# EAGLE board 7 (EAGLE 9.6.2)
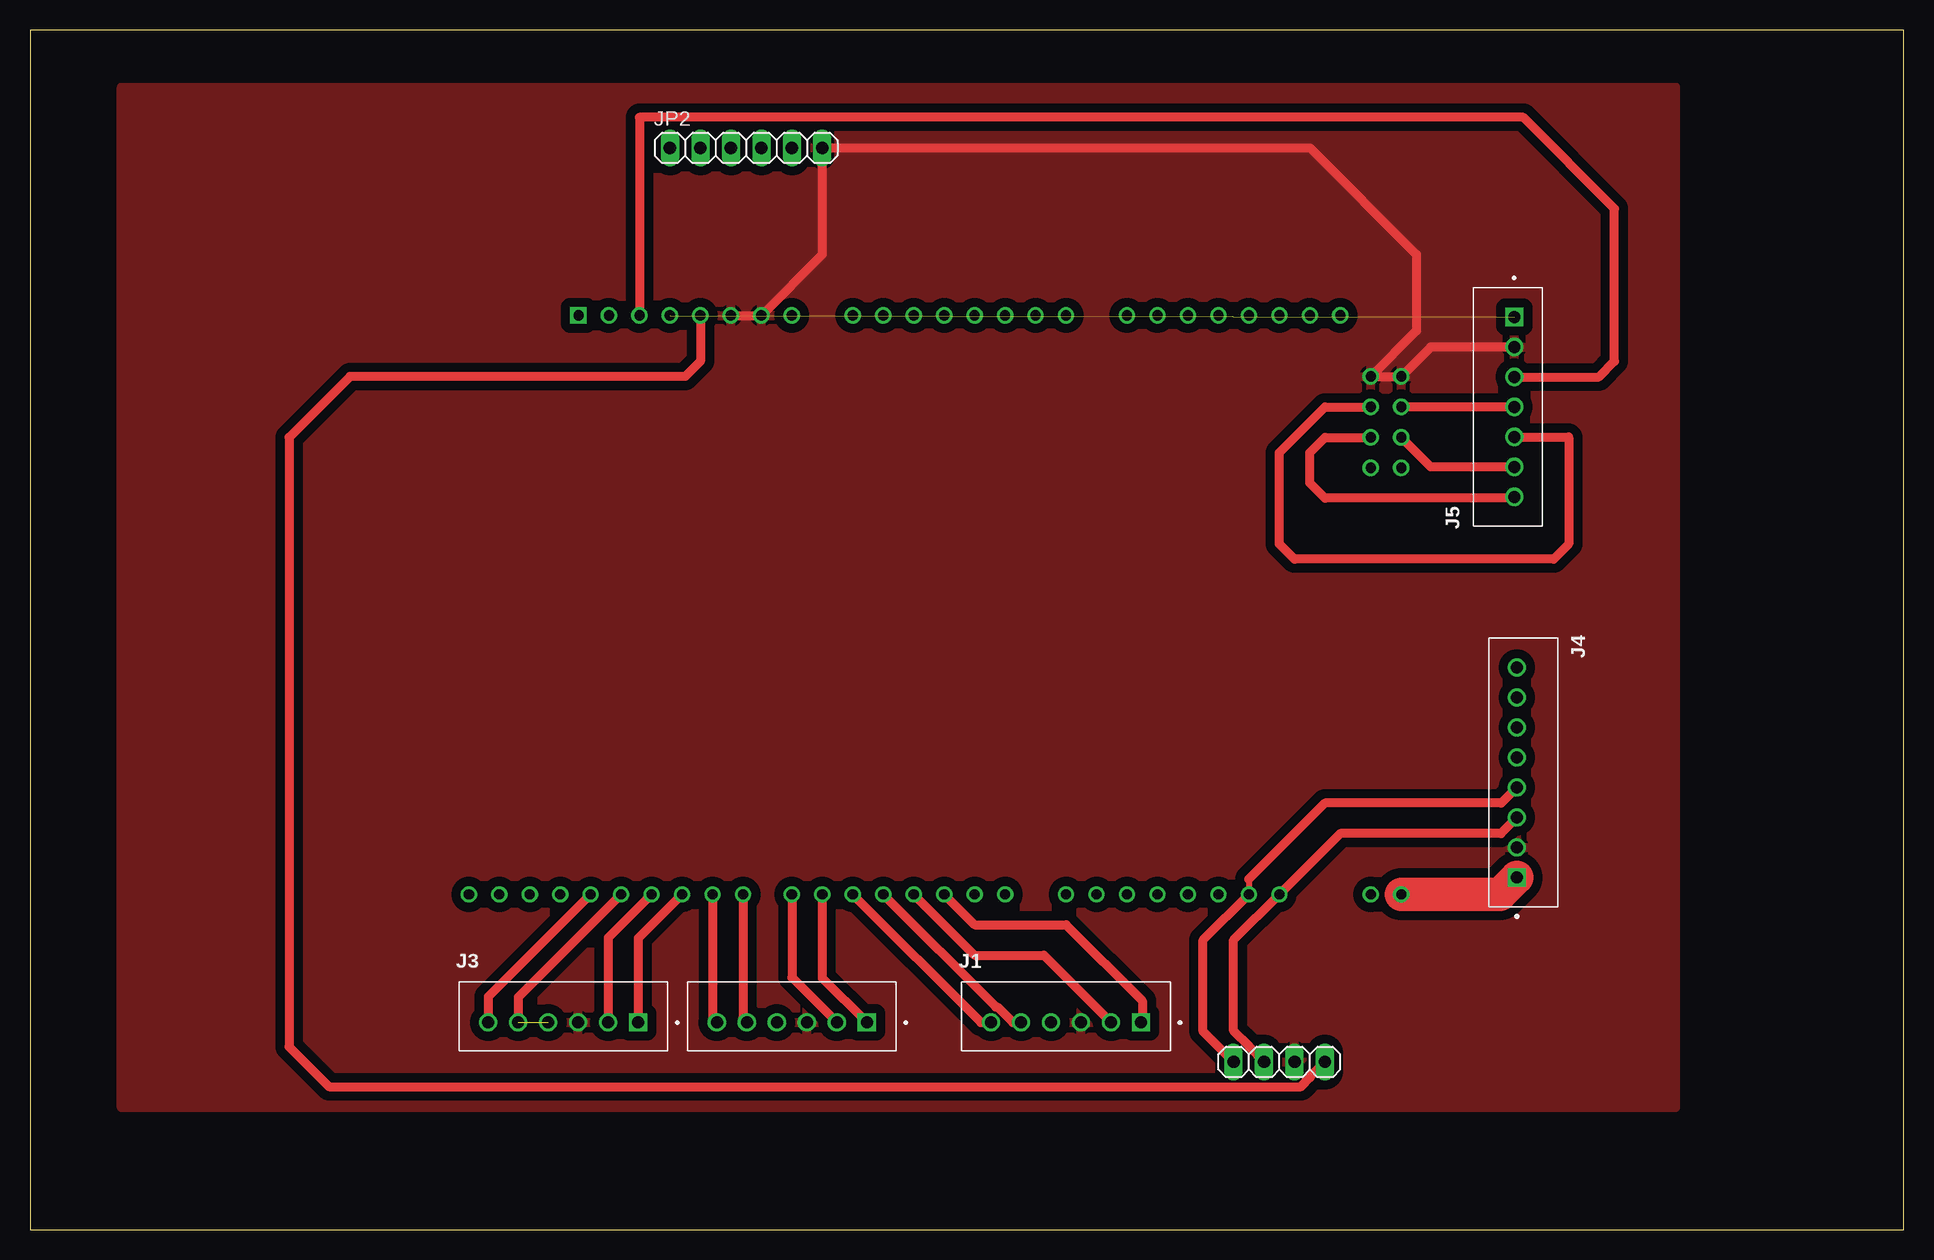
[diagram p0: board, top side]
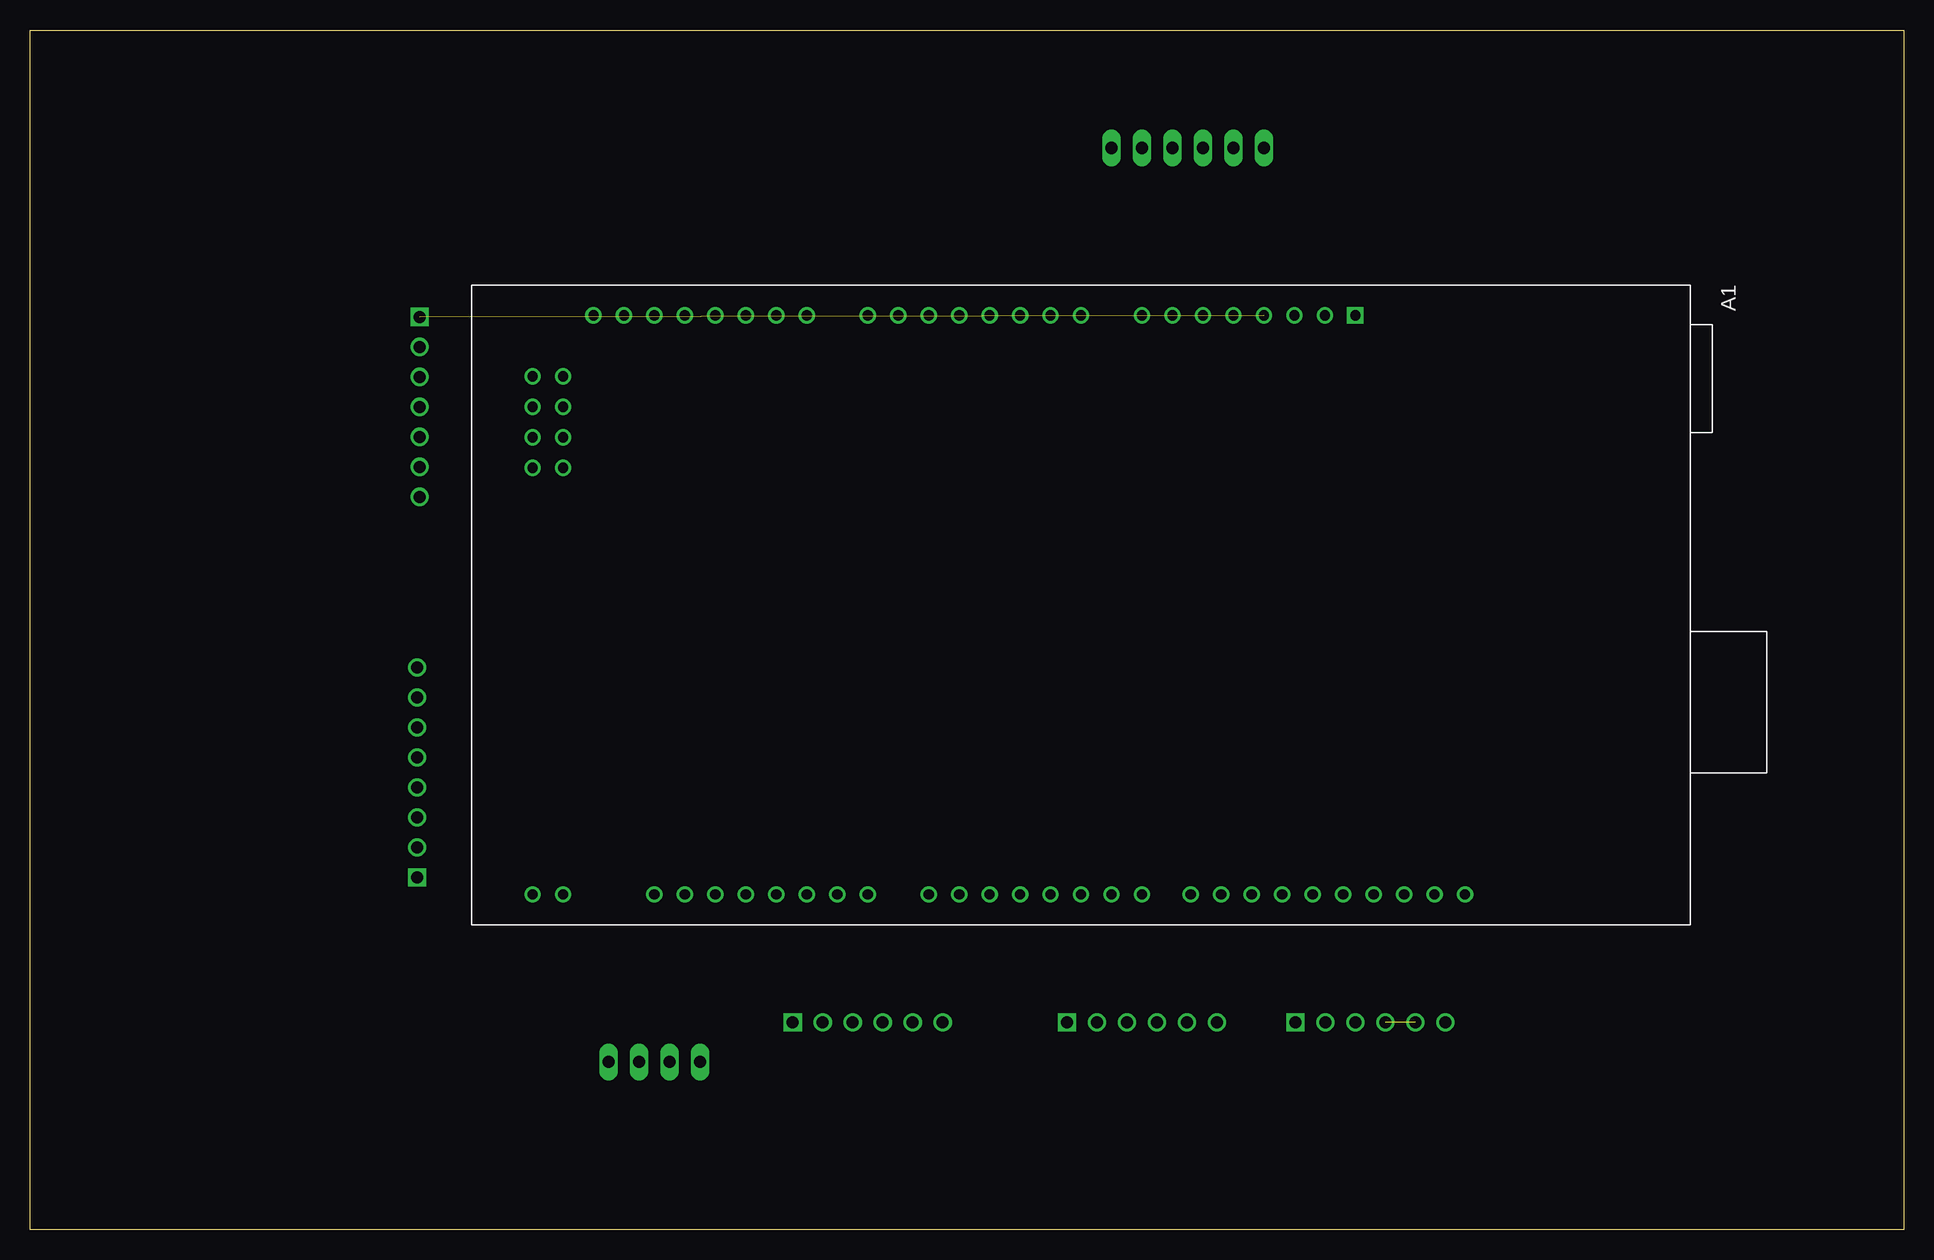
[diagram p1: board, bottom side, seen from below]

Size 156.19 x 100 mm. Coordinates in mm from the lower left corner, seen from the top.
Outline: 0,0 156.19,0 156.19,100 0,100 0,0
Copper layers (1*16): Top 0.035mm / dielectric 1.5mm / Bottom 0.035mm
Design rules "default": minimum track width 6mil, minimum drill 0.35mm, track to track 6mil, track to pad 6mil, pad to pad 6mil, via to via 6mil, smd to smd 6mil, copper to edge 40mil, drill to drill 6mil, minimum pad ring 10mil, minimum via ring 8mil, stop-mask expansion 4mil, vias tented up to drill 0mil, thermal gap 10mil

## Footprints (pad centres in the part's own frame; a part is rotated, then mirrored left to right if it is on the bottom)
ARDUINO_ARDUINO_MEGA_2560_REV3_A000067 = drill 0.85: 0 24.13,-12.7; 1 24.13,-10.16; 2 24.13,-7.62; 3 24.13,-5.08; 3V3 -24.13,15.24; 4 24.13,-2.54; 5 24.13,0; 5V_1 -24.13,12.7; 5V_2 24.13,-43.18; 5V_3 24.13,-45.72; 6 24.13,2.54; 7 24.13,5.08; 8 24.13,9.144; 9 24.13,11.684; 10 24.13,14.224; 11 24.13,16.764; 12 24.13,19.304; 13 24.13,21.844; 14 24.13,-17.78; 15 24.13,-20.32; 16 24.13,-22.86; 17 24.13,-25.4; 18 24.13,-27.94; 19 24.13,-30.48; 20 24.13,-33.02; 21 24.13,-35.56; 48 -11.43,-43.18; 49 -11.43,-45.72; 50 -13.97,-43.18; 51 -13.97,-45.72; 52 -16.51,-43.18; 53 -16.51,-45.72; AD0 -24.13,0; AD1 -24.13,-2.54; AD2 -24.13,-5.08; AD3 -24.13,-7.62; AD4 -24.13,-10.16; AD5 -24.13,-12.7; AD6 -24.13,-15.24; AD7 -24.13,-17.78; AD8 -24.13,-22.86; AD9 -24.13,-25.4; AD10 -24.13,-27.94; AD11 -24.13,-30.48; AD12 -24.13,-33.02; AD13 -24.13,-35.56; AD14 -24.13,-38.1; AD15 -24.13,-40.64; AREF 24.13,26.924; GND1 -24.13,10.16; GND2 -24.13,7.62; GND3 24.13,24.384; GND4 -19.05,-43.18; GND5 -19.05,-45.72; IOREF -24.13,20.32; RESET -24.13,17.78; SCL 24.13,32.004; SDA 24.13,29.464; VIN -24.13,5.08 | drill 0.85 square: NC -24.13,22.86
JST_B6B-XH-A(LF)(SN) = drill 1 square: 1 6.25,-0.525 | drill 1: 2 3.75,-0.525; 3 1.25,-0.525; 4 -1.25,-0.525; 5 -3.75,-0.525; 6 -6.25,-0.525
JST_B8B-XH-A(LF)(SN) = drill 1 square: 1 8.75,-0.525 | drill 1: 2 6.25,-0.525; 3 3.75,-0.525; 4 1.25,-0.525; 5 -1.25,-0.525; 6 -3.75,-0.525; 7 -6.25,-0.525; 8 -8.75,-0.525
JST_B7B-XH-A = drill 1 square: 1 7.5,-0.525 | drill 1: 2 5,-0.525; 3 2.5,-0.525; 4 0,-0.525; 5 -2.5,-0.525; 6 -5,-0.525; 7 -7.5,-0.525
1X04 = drill 1.016 long: 1 -3.81,0; 2 -1.27,0; 3 1.27,0; 4 3.81,0
1X06 = drill 1.016 long: 1 -6.35,0; 2 -3.81,0; 3 -1.27,0; 4 1.27,0; 5 3.81,0; 6 6.35,0

## Placement (x,y rotation side)
A1  ARDUINO_MEGA_2560_REV3_A000067  [ARDUINO_ARDUINO_MEGA_2560_REV3_A000067]  68.58,52.07 270 bottom
J1  B6B-XH-A(LF)(SN)  [JST_B6B-XH-A(LF)(SN)]  86.36,17.78 0 top
J2  B6B-XH-A(LF)(SN)  [JST_B6B-XH-A(LF)(SN)]  63.5,17.78 0 top
J3  B6B-XH-A(LF)(SN)  [JST_B6B-XH-A(LF)(SN)]  44.45,17.78 0 top
J4  B8B-XH-A(LF)(SN)  [JST_B8B-XH-A(LF)(SN)]  124.46,38.1 270 top
J5  B7B-XH-A  [JST_B7B-XH-A]  123.19,68.58 90 top
JP1  [1X04]  104.14,13.97 180 top
JP2  [1X06]  59.69,90.17 0 top

## Library data of the parts
A1 = Arduino mega for ROV; AVAILABILITY: Not in stock; CHECK_PRICES: https://www.snapeda.com/parts/ARDUINO%20MEGA%202560%20REV3%20%7C%20A000067/Arduino/view-part/?ref=eda; DESCRIPTION: ATmega2560 Arduino Mega2560 AVR® ATmega AVR MCU 8-Bit Embedded Evaluation Board; MF: Arduino; MP: ARDUINO MEGA 2560 REV3 | A000067; PACKAGE: Non-Standard Arduino; PRICE: None; PURCHASE-URL: https://www.snapeda.com/api/url_track_click_mouser/?unipart_id=7072122&manufacturer=Arduino&part_name=ARDUINO MEGA 2560 REV3 | A000067&search_term=None; SNAPEDA_LINK: https://www.snapeda.com/parts/ARDUINO%20MEGA%202560%20REV3%20%7C%20A000067/Arduino/view-part/?ref=snap
J1-J3 = data-cable(6-pin); AVAILABILITY: In Stock; CHECK_PRICES: https://www.snapeda.com/parts/B6B-XH-A%20(LF)(SN)/JST/view-part/?ref=eda; DESCRIPTION: Connector Header Through Hole 6 position 0.098 (2.50mm); MF: JST Sales; MP: B6B-XH-A (LF)(SN); PACKAGE: None; PRICE: None; SNAPEDA_LINK: https://www.snapeda.com/parts/B6B-XH-A%20(LF)(SN)/JST/view-part/?ref=snap
J4 = data-cable(8-pin); AVAILABILITY: In Stock; CHECK_PRICES: https://www.snapeda.com/parts/B8B-XH-A%20(LF)(SN)/JST/view-part/?ref=eda; DESCRIPTION: Connector Header Through Hole 8 position 0.098 (2.50mm); MF: JST Sales; MP: B8B-XH-A (LF)(SN); PACKAGE: None; PRICE: None; SNAPEDA_LINK: https://www.snapeda.com/parts/B8B-XH-A%20(LF)(SN)/JST/view-part/?ref=snap
J5 = data-cable(7-pin); AVAILABILITY: In Stock; CHECK_PRICES: https://www.snapeda.com/parts/B7B-XH-A/JST/view-part/?ref=eda; DESCRIPTION: Connector Header Through Hole 7 position 0.098 (2.50mm); MF: JST Sales; MP: B7B-XH-A; PACKAGE: None; PRICE: None; SNAPEDA_LINK: https://www.snapeda.com/parts/B7B-XH-A/JST/view-part/?ref=snap
JP1 JP2 = pinhead

## Nets
3V3: A1.3V3 J5.1
5V: A1.5V_3 J4.1
5V_1: A1.5V_1 JP1.1
D2: A1.2 J1.1
D3: A1.3 J1.2
D4: A1.4 J1.5
D5: A1.5 J1.6
D6: A1.6 J2.1
D7: A1.7 J2.2
D8: A1.8 J2.5
D9: A1.9 J2.6
D10: A1.10 J3.1
D11: A1.11 J3.2
D12: A1.12 J3.4 J3.5
D13: A1.13 J3.6
GND: A1.GND1 A1.GND2 A1.GND4 A1.GND5 J1.3 J2.3 J3.3 J4.2 J5.2 JP1.2 JP2.6
MISO: A1.50 J5.7
MOSI: A1.51 J5.6
N$2: A1.18
N$3: A1.17
N$4: J1.4
N$5: J2.4
N$6: A1.16
N$7: A1.GND3
RST: A1.RESET J5.3
RX: JP2.2
SCK: A1.52 J5.5
SCL: A1.21 J4.3 JP1.3
SDA: A1.20 J4.4 JP1.4
SS: A1.53 J5.4
TX: JP2.3

## Tracks (layer width: path | path; a pad name or v marks a point on that pad's centre or on a via)
3V3  (1 unrouted)
5V
  Top 2.794: J4.1 122.53,27.94 A1.5V_3
5V_1
  Top 0.762: A1.5V_1 55.88,72.39 54.61,71.12 26.67,71.12 21.59,66.04 21.59,15.24 24.92,11.91 105.95,11.91 106.7,12.67 106.7,12.72 JP1.1
D2
  Top 0.762: A1.2 78.74,25.4 86.36,25.4 92.71,19.05 92.71,17.36 J1.1
D3
  Top 0.762: A1.3 78.74,22.86 84.5,22.86 J1.2
D4
  Top 0.762: A1.4 80.52,18.54 80.64,18.54 81.93,17.25 J1.5
D5
  Top 0.762: A1.5 79.27,17.25 J1.6
D6
  Top 0.762: A1.6 66.04,20.96 J2.1
D7
  Top 0.762: A1.7 63.5,21 J2.2
D8
  Top 0.762: A1.8 59.44,17.57 J2.5
D9
  Top 0.762: A1.9 56.9,17.61 J2.6
D10
  Top 0.762: A1.10 50.7,24.28 J3.1
D11
  Top 0.762: A1.11 48.2,24.32 J3.2
D12  (1 unrouted)
  Top 0.762: A1.12 40.7,19.36 J3.5
D13
  Top 0.762: A1.13 38.2,19.4 J3.6
GND
  Top 0.762: J5.2 116.76,73.58 A1.GND5 A1.GND4 115.57,74.93 115.57,81.28 106.68,90.17 JP2.6 66.04,81.28 A1.GND2 A1.GND1
  pour Top (isolate 0.762): 7.62,95.25 137.16,95.25 137.16,10.16 7.62,10.16
MISO
  Top 0.762: J5.7 123.59,60.96 107.95,60.96 106.68,62.23 106.68,64.77 107.95,66.04 A1.50
MOSI
  Top 0.762: J5.6 116.76,63.58 A1.51
RST
  Top 0.762: 123.75,71.12 J5.3 130.77,71.08 132.08,72.39 132.08,85.09 124.46,92.71 50.8,92.71 A1.RESET
SCK
  Top 0.762: J5.5 128.23,66.08 128.27,66.04 128.27,57.15 127,55.88 105.41,55.88 104.14,57.15 104.14,64.77 107.95,68.58 A1.52
SCL
  Top 0.762: 123.88,34.29 J4.3 122.6,33.02 109.22,33.02 A1.21 100.33,24.13 100.33,16.56 101.62,15.27 101.62,15.21 JP1.3
SDA
  Top 0.508: 101.6,29.21 A1.20
  Top 0.762: J4.4 122.64,35.56 107.95,35.56 101.6,29.21 | JP1.4 97.79,16.51 97.79,24.13 A1.20
SS
  Top 0.762: J5.4 A1.53